# EAGLE board Small_Ethernet (EAGLE 7.3.0)
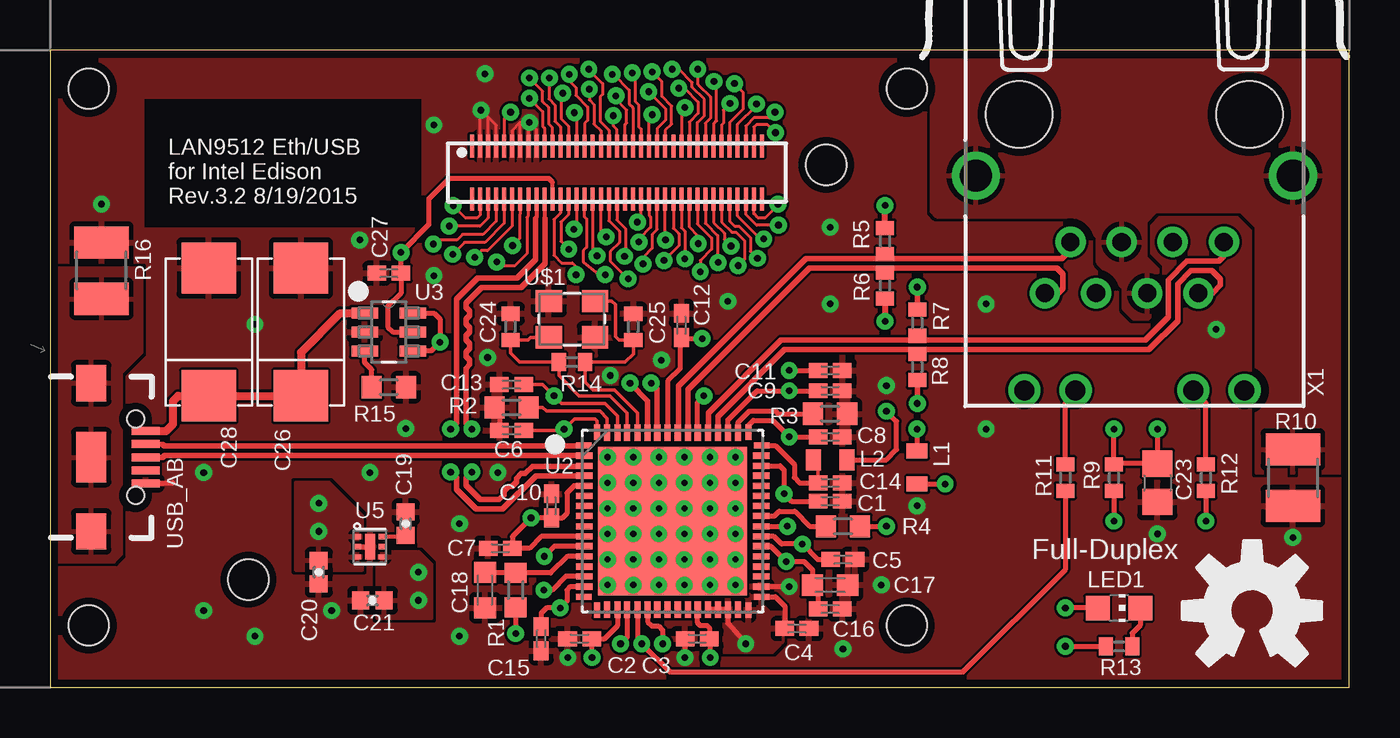
[diagram p0: board, top side]
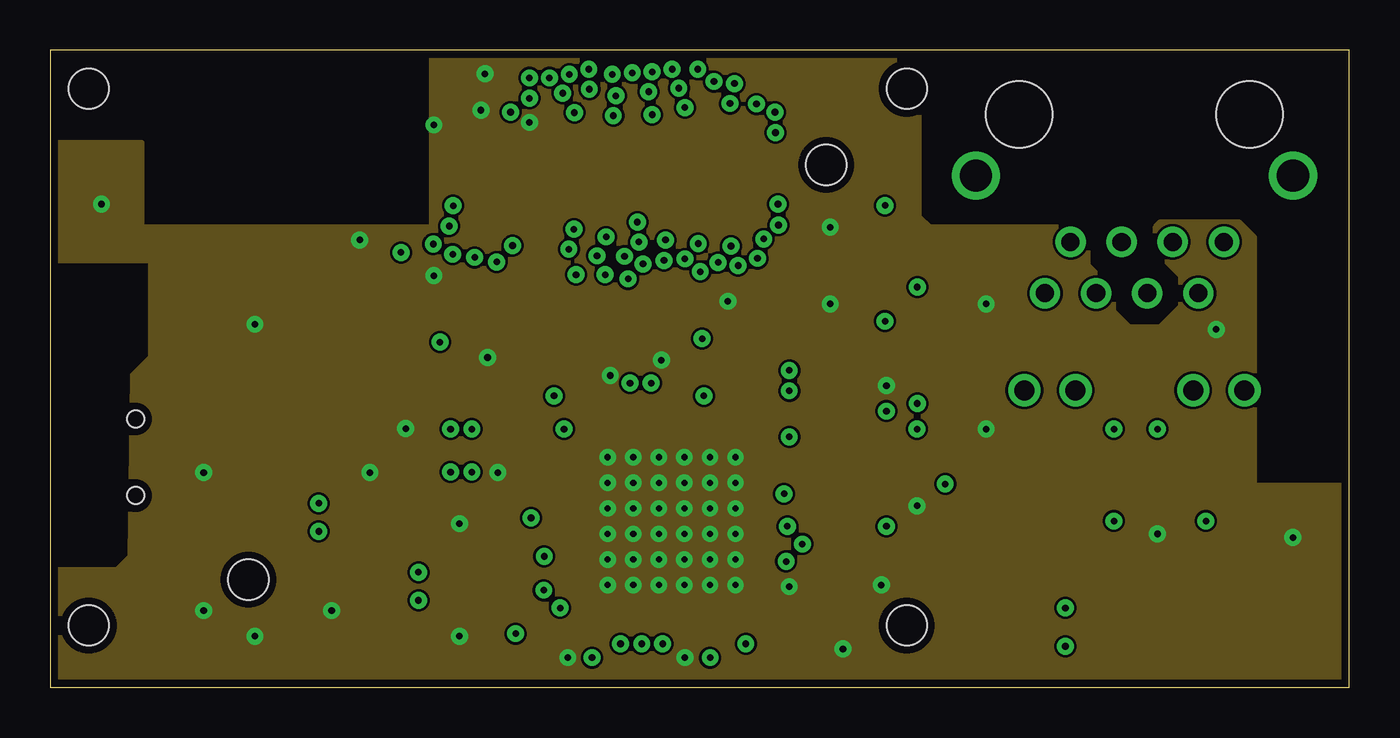
[diagram p1: board, inner layer gnd]
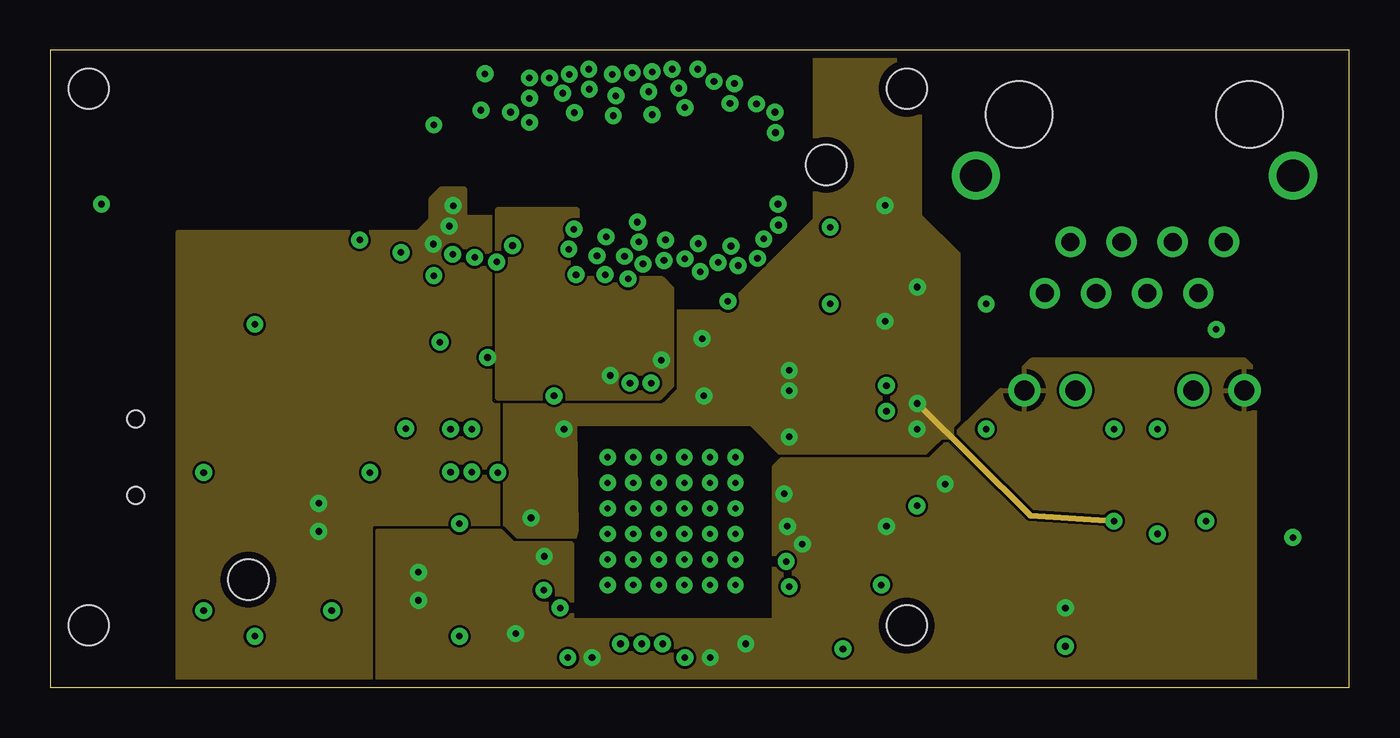
[diagram p2: board, inner layer pwr]
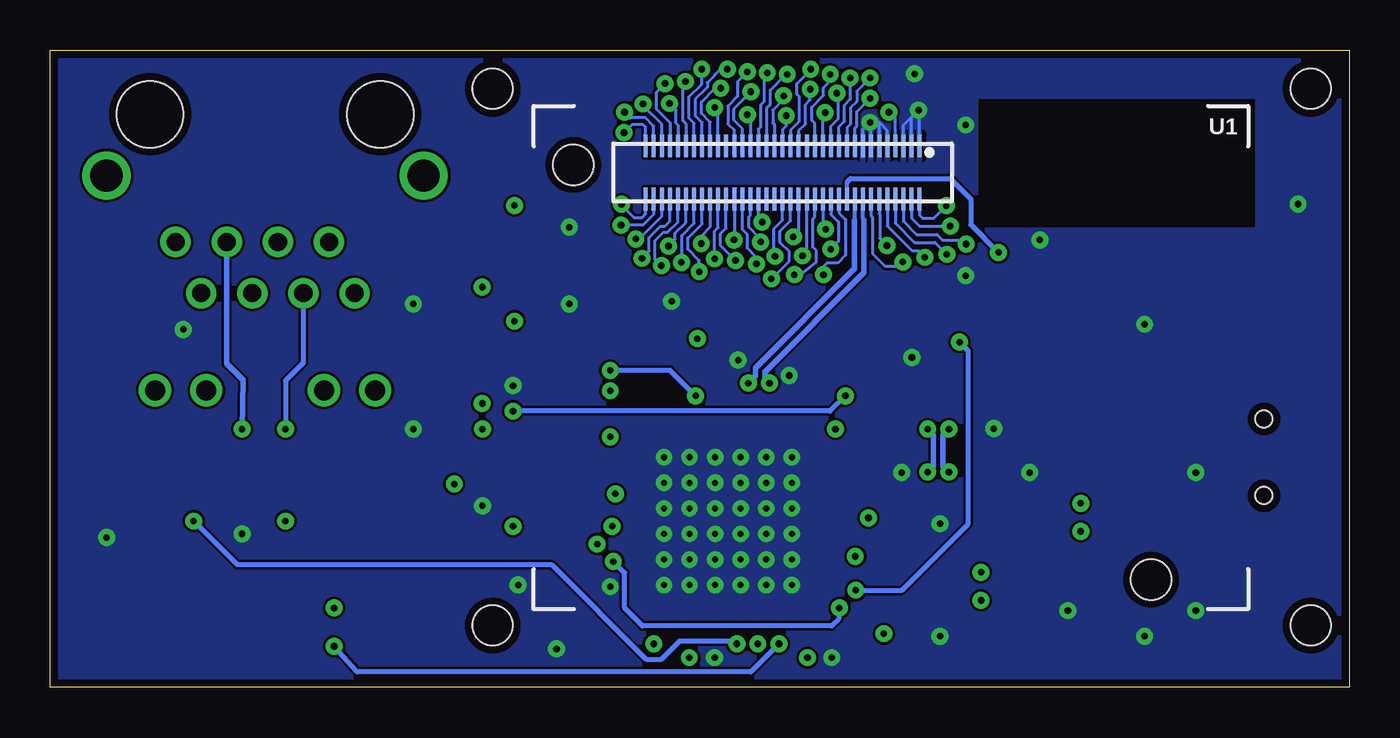
[diagram p3: board, bottom side, seen from below]

Size 64.52 x 31.65 mm. Coordinates in mm from the lower left corner, seen from the top.
Outline: 0,0 64.52,0 64.52,31.65 0,31.65 0,0
Copper layers (1*2*3*16): Top 0.035mm / dielectric 1.5mm / gnd 0.035mm / dielectric 0.15mm / pwr 0.035mm / dielectric 0.2mm / Bottom 0.035mm
Design rules "SparkFun *": minimum track width 5mil, minimum drill 6mil, track to track 5mil, track to pad 5mil, pad to pad 5mil, via to via 5mil, smd to smd 5mil, copper to edge 15mil, drill to drill 8mil, minimum pad ring 12mil, minimum via ring 10mil, stop-mask expansion 4mil, vias tented up to drill 25mil, thermal gap 10mil
Holes 2 mm at 42.55,29.74 42.55,3.07 1.91,3.07 1.91,29.74
tRestrict: area 4.7,22.9 to 18.4,29.2
bRestrict: area 4.7,22.9 to 18.4,29.2

## Footprints (pad centres in the part's own frame; a part is rotated, then mirrored left to right if it is on the bottom)
C0402K = smd 0.925 x 0.74: 1 -0.6,0; 2 0.6,0
C0603K = smd 1.05 x 1.08: 1 -0.875,0; 2 0.875,0
0402-CAP = smd 0.85 x 0.9: 1 -0.58,0; 2 0.58,0
C0805 = smd 1.3 x 1.5: 1 -0.95,0; 2 0.95,0
C0402 = smd 0.7 x 0.9: 1 -0.65,0; 2 0.65,0
CAP-2917 = smd 2.55 x 2.7: NEG -3.175,0; POS 3.175,0
L0603 = smd 0.75 x 1.05: 1 -0.825,0; 2 0.825,0
CHIP-LED0805 = smd 1.2 x 1.2: A 0,-1.05; C 0,1.05
R0603 = smd 1 x 1.1: 1 -0.85,0; 2 0.85,0
R0402 = smd 0.7 x 0.9: 1 -0.65,0; 2 0.65,0
R1210 = smd 1.6 x 2.7: 1 -1.4,0; 2 1.4,0
EDISON_DAUGHTER = smd 1.14 x 0.2: 1 1.98,19.17; 2 4.62,19.17; 3 1.98,18.77; 4 4.62,18.77; 5 1.98,18.37; 6 4.62,18.37; 7 1.98,17.97; 8 4.62,17.97; 9 1.98,17.57; 10 4.62,17.57; 11 1.98,17.17; 12 4.62,17.17; 13 1.98,16.77; 14 4.62,16.77; 15 1.98,16.37; 16 4.62,16.37; 17 1.98,15.97; 18 4.62,15.97; 19 1.98,15.57; 20 4.62,15.57; 21 1.98,15.17; 22 4.62,15.17; 23 1.98,14.77; 24 4.62,14.77; 25 1.98,14.37; 26 4.62,14.37; 27 1.98,13.97; 28 4.62,13.97; 29 1.98,13.57; 30 4.62,13.57; 31 1.98,13.17; 32 4.62,13.17; 33 1.98,12.77; 34 4.62,12.77; 35 1.98,12.37; 36 4.62,12.37; 37 1.98,11.97; 38 4.62,11.97; 39 1.98,11.57; 40 4.62,11.57; 41 1.98,11.17; 42 4.62,11.17; 43 1.98,10.77; 44 4.62,10.77; 45 1.98,10.37; 46 4.62,10.37; 47 1.98,9.97; 48 4.62,9.97; 49 1.98,9.57; 50 4.62,9.57; 51 1.98,9.17; 52 4.62,9.17; 53 1.98,8.77; 54 4.62,8.77; 55 1.98,8.37; 56 4.62,8.37; 57 1.98,7.97; 58 4.62,7.97; 59 1.98,7.57; 60 4.62,7.57; 61 1.98,7.17; 62 4.62,7.17; 63 1.98,6.77; 64 4.62,6.77; 65 1.98,6.37; 66 4.62,6.37; 67 1.98,5.97; 68 4.62,5.97; 69 1.98,5.57; 70 4.62,5.57 | hole 2: 23.53,30.67; 2.93,1.98
QFN50P900X900X100-65N = smd 0.762 x 0.305: 1 -4.42,3.759; 16 -4.42,-3.759; 33 4.42,-3.759; 48 4.42,3.759 | smd 0.813 x 0.305: 2 -4.394,3.251; 3 -4.394,2.743; 4 -4.394,2.261; 5 -4.394,1.753; 6 -4.394,1.245; 7 -4.394,0.762; 8 -4.394,0.254; 9 -4.394,-0.254; 10 -4.394,-0.762; 11 -4.394,-1.245; 12 -4.394,-1.753; 13 -4.394,-2.261; 14 -4.394,-2.743; 15 -4.394,-3.251; 34 4.394,-3.251; 35 4.394,-2.743; 36 4.394,-2.261; 37 4.394,-1.753; 38 4.394,-1.245; 39 4.394,-0.762; 40 4.394,-0.254; 41 4.394,0.254; 42 4.394,0.762; 43 4.394,1.245; 44 4.394,1.753; 45 4.394,2.261; 46 4.394,2.743; 47 4.394,3.251 | smd 0.305 x 0.762: 17 -3.759,-4.42; 32 3.759,-4.42; 49 3.759,4.42; 64 -3.759,4.42 | smd 0.305 x 0.813: 18 -3.251,-4.394; 19 -2.743,-4.394; 20 -2.261,-4.394; 21 -1.753,-4.394; 22 -1.245,-4.394; 23 -0.762,-4.394; 24 -0.254,-4.394; 25 0.254,-4.394; 26 0.762,-4.394; 27 1.245,-4.394; 28 1.753,-4.394; 29 2.261,-4.394; 30 2.743,-4.394; 31 3.251,-4.394; 50 3.251,4.394; 51 2.743,4.394; 52 2.261,4.394; 53 1.753,4.394; 54 1.245,4.394; 55 0.762,4.394; 56 0.254,4.394; 57 -0.254,4.394; 58 -0.762,4.394; 59 -1.245,4.394; 60 -1.753,4.394; 61 -2.261,4.394; 62 -2.743,4.394; 63 -3.251,4.394 | smd 7.391 x 7.391: 65 0,0
21-0058I = smd 1.321 x 0.559: 1 -1.194,0.94; 2 -1.194,0; 3 -1.194,-0.94; 4 1.194,-0.94; 5 1.194,0; 6 1.194,0.94
DF40C-70DP-0.4(51) = smd 0.2 x 1.14 bottom: 1 6.8,1.32; 2 6.8,-1.32; 3 6.4,1.32; 4 6.4,-1.32; 5 6,1.32; 6 6,-1.32; 7 5.6,1.32; 8 5.6,-1.32; 9 5.2,1.32; 10 5.2,-1.32; 11 4.8,1.32; 12 4.8,-1.32; 13 4.4,1.32; 14 4.4,-1.32; 15 4,1.32; 16 4,-1.32; 17 3.6,1.32; 18 3.6,-1.32; 19 3.2,1.32; 20 3.2,-1.32; 21 2.8,1.32; 22 2.8,-1.32; 23 2.4,1.32; 24 2.4,-1.32; 25 2,1.32; 26 2,-1.32; 27 1.6,1.32; 28 1.6,-1.32; 29 1.2,1.32; 30 1.2,-1.32; 31 0.8,1.32; 32 0.8,-1.32; 33 0.4,1.32; 34 0.4,-1.32; 35 0,1.32; 36 0,-1.32; 37 -0.4,1.32; 38 -0.4,-1.32; 39 -0.8,1.32; 40 -0.8,-1.32; 41 -1.2,1.32; 42 -1.2,-1.32; 43 -1.6,1.32; 44 -1.6,-1.32; 45 -2,1.32; 46 -2,-1.32; 47 -2.4,1.32; 48 -2.4,-1.32; 49 -2.8,1.32; 50 -2.8,-1.32; 51 -3.2,1.32; 52 -3.2,-1.32; 53 -3.6,1.32; 54 -3.6,-1.32; 55 -4,1.32; 56 -4,-1.32; 57 -4.4,1.32; 58 -4.4,-1.32; 59 -4.8,1.32; 60 -4.8,-1.32; 61 -5.2,1.32; 62 -5.2,-1.32; 63 -5.6,1.32; 64 -5.6,-1.32; 65 -6,1.32; 66 -6,-1.32; 67 -6.4,1.32; 68 -6.4,-1.32; 69 -6.8,1.32; 70 -6.8,-1.32; NC1 7.2,1.32; NC2 7.2,-1.32; NC3 -7.2,-1.32; NC4 -7.2,1.32
6-UFDFN = smd 1.25 x 0.5: GND 0,0 | smd 0.26 x 0.4: P1 -0.5,-0.625; P2 0,-0.625; P3 0.5,-0.625; P4 0.5,0.625; P5 0,0.625; P6 -0.5,0.625
SMDCRYSTAL_3.2X2.5 = smd 1.3 x 1.1: P1_I/O -1.15,-0.9; P2_GND 1.15,-0.9; P3_O/I 1.15,0.9; P4_GND -1.15,0.9
USB-AB-MICRO-SMD_V03 = smd 1.4 x 0.4: D+1 2.7,0; D-1 2.7,0.65; GND1 2.7,-1.3; ID1 2.7,-0.65; VBUS1 2.7,1.3 | smd 1.5 x 1.8: SHIELD1 0,3.68; SHIELD3 0,-3.68 | smd 1.5 x 2.5: SHIELD2 0,0 | hole 0.85: 2.2,1.9; 2.2,-1.9
J1 = drill 0.9 pad 1.3: 1 4.445,2.54; 2 3.175,0; 3 1.905,2.54; 4 0.635,0; 5 -0.635,2.54; 6 -1.905,0; 7 -3.175,2.54; 8 -4.445,0 | drill 1 pad 1.422: 9 5.465,7.37; 10 2.925,7.37; 11 -2.925,7.37; 12 -5.465,7.37 | drill 1.6 pad 2.184: M1 -7.875,-3.3; M2 7.875,-3.3 | hole 3.3: 5.715,-6.35; -5.715,-6.35

## Placement (x,y rotation side)
C1  0.1  [C0402K]  38.73,9.25 0 top
C2  0.1  [C0402K]  26.29,2.41 180 top
C3  0.1  [C0402K]  32.13,2.41 180 top
C4  0.1  [C0402K]  37.08,2.92 0 top
C5  0.1  [C0402K]  39.37,6.35 0 top
C6  0.1  [C0402K]  22.91,12.76 180 top
C7  0.1  [C0402K]  22.35,6.91 180 top
C8  0.1  [C0402K]  38.73,12.45 0 top
C9  0.1  [C0402K]  38.73,14.73 0 top
C10  0.1  [C0402K]  24.89,9.02 90 top
C11  0.1  [C0402K]  38.73,15.75 0 top
C12  0.1  [C0402K]  31.34,17.98 90 top
C13  1.0  [C0402K]  22.91,15.04 180 top
C14  0.1  [C0402K]  38.73,10.16 0 top
C15  0.1  [C0402K]  24.38,2.41 270 top
C16  0.1  [C0402K]  38.73,3.89 0 top
C17  4.7  [C0603K]  38.73,5.08 0 top
C18  0.01uF  [C0603K]  21.59,4.83 270 top
C19  .1uF  [0402-CAP]  17.65,8.13 90 top
C20  1uF  [0402-CAP]  13.34,5.71 90 top
C21  1uF  [0402-CAP]  16,4.32 180 top
C23  0.022uF  [C0805]  54.99,10.16 270 top
C24  33pF  [C0402]  22.86,17.91 90 top
C25  33pF  [C0402]  28.96,17.91 90 top
C26  [CAP-2917]  12.45,17.65 270 top
C27  1.0  [C0402K]  16.81,20.57 180 top
C28  [CAP-2917]  7.87,17.65 270 top
E$2  [OSHW-LOGO-L]  59.69,3.81 0 top
L1  2.0A 120Ohm  [L0603]  43.05,10.92 90 top
L2  2.0A 120Ohm  [L0603]  38.73,11.3 180 top
LED1  Green LED  [CHIP-LED0805]  53.09,3.94 270 top
R1  10K  [R0603]  23.11,4.83 270 top
R2  12K  [R0603]  22.91,13.9 180 top
R3  12.4K  [R0603]  38.73,13.59 0 top
R4  10K  [R0603]  39.37,8 0 top
R5  49.9  [R0402]  41.46,22.16 90 top
R6  49.9  [R0402]  41.46,19.96 270 top
R7  49.9  [R0402]  43.06,18.12 90 top
R8  49.9  [R0402]  43.06,15.91 270 top
R9  10  [R0402]  52.83,10.41 270 top
R10  0  [R1210]  61.72,10.41 270 top
R11  330  [R0402]  50.42,10.41 270 top
R12  330  [R0402]  57.4,10.41 270 top
R13  330  [R0402]  53.09,2.03 180 top
R14  1M  [R0402]  25.91,16.15 0 top
R15  56k  [R0603]  16.81,14.91 180 top
R16  0  [R1210]  2.54,20.7 90 top
U1  EDISON_CONNECTOR_FULLMOUNTING_HOLES  [EDISON_DAUGHTER]  40.51,28.88 270 bottom
U2  LAN9512-JZX  [QFN50P900X900X100-65N]  30.91,8.26 0 top
U3  MAX4995AAUT+  [21-0058I]  16.81,17.65 0 top
U4  EDISON_CONNECTOR_FULLHEADER  [DF40C-70DP-0.4(51)]  28.14,25.58 0 bottom
U5  [6-UFDFN]  15.88,6.99 270 top
U$1  [SMDCRYSTAL_3.2X2.5]  25.91,18.29 0 top
USB_AB  [USB-AB-MICRO-SMD_V03]  2.03,11.43 0 top
X1  J1011F01P  [J1]  53.85,22.12 180 top

## Library data of the parts
C1-C18 C24 C25 C27 R15 = rcl
C19-C21 = SparkFun-Capacitors
C23 R1-R14 R16 = resistor
C26 C28 U5 U$1 = PoEdev
E$2 = SparkFun-Aesthetics
L1 L2 = murata-inductors
LED1 = led
U1 U4 = Edison
U2 = Lan9512; MPN: LAN9512-JZX; OC_FARNELL: 2292586; OC_NEWARK: 66W1988; PACKAGE: 64VQFN; SUPPLIER: Microchip
U3 = MAX4995; MANUFACTURER_PART_NUMBER: max4995aaut+; VENDOR: MAXIM
USB_AB = SparkFun-Connectors
X1 = con-pulse; OC_FARNELL: unknown; OC_NEWARK: unknown

## Nets
BYP: C19.1 U5.P6
CLKOUT: U2.45
DSUSB_N: U2.1 USB_AB.D-1
DSUSB_P: U2.2 USB_AB.D+1
GND: C1.2 C2.2 C3.2 C4.2 C5.2 C6.2 C7.2 C8.2 C9.2 C10.2 C11.2 C12.2 C13.2 C14.2 C15.2 C16.2 C17.2 C18.2 C19.2 C20.1 C21.2 C23.2 C24.2 C25.2 C26.NEG C27.2 C28.NEG R2.2 R3.2 R10.2 R15.1 R16.2 U1.1 U1.3 U1.5 U1.9 U1.11 U1.13 U1.15 U2.34 U3.2 U4.1 U4.3 U4.5 U4.9 U4.11 U4.13 U4.15 U5.GND U5.P2 U$1.P2_GND U$1.P4_GND USB_AB.GND1
GP28_I2C_6_SDA: U1.47 U4.47
N$1: C13.1 L2.1 U2.62
N$2: C14.1 L2.2 U2.48
N$3: U2.16
N$4: C15.1 C16.1 C17.1 U2.15 U2.38
N$6: R2.1 U2.63
N$7: C18.1 R1.1 U2.12
N$8: R3.1 U2.50
N$9: R4.1 U2.41
N$10: C23.1 R9.1 X1.3 X1.6
N$15: R11.2 U2.21
N$16: R11.1 X1.10
N$17: R12.1 X1.11
N$18: R12.2 U2.22
N$19: LED1.C R13.1
N$20: R13.2 U2.20
N$21: C24.1 R14.1 U2.61 U$1.P1_I/O
N$22: C25.1 R14.2 U2.60 U$1.P3_O/I
N$23: U2.14 U3.4 U3.6
N$26: R15.2 U3.3
P7: U1.7 U4.7
P12: U1.12 U4.12
P14: U1.14 U4.14
P17: U1.17 U4.17
P19: U1.19 U4.19
P21: U1.21 U4.21
P22: U1.22 U4.22
P23: U1.23 U4.23
P24: U1.24 U4.24
P25: U1.25 U4.25
P26: U1.26 U4.26
P27: U1.27 U4.27
P28: U1.28 U4.28
P30: U1.30 U4.30
P31: U1.31 U4.31
P32: U1.32 U4.32
P33: U1.33 U4.33
P34: U1.34 U4.34
P35: U1.35 U4.35
P36: U1.36 U4.36
P37: U1.37 U4.37
P39: U1.39 U4.39
P41: U1.41 U4.41
P42: U1.42 U4.42
P43: U1.43 U4.43
P44: U1.44 U4.44
P45: U1.45 U4.45
P46: U1.46 U4.46
P48: U1.48 U4.48
P50: U1.50 U4.50
P51: U1.51 U4.51
P52: U1.52 U4.52
P53: U1.53 U4.53
P54: U1.54 U4.54
P55: U1.55 U4.55
P56: U1.56 U4.56
P57: U1.57 U4.57
P58: U1.58 U4.58
P59: U1.59 U4.59
P60: U1.60 U4.60
P61: U1.61 U4.61
P62: U1.62 U4.62
P63: U1.63 U4.63
P64: U1.64 U4.64
P65: U1.65 U4.65
P66: U1.66 U4.66
P67: U1.67 U4.67
P68: U1.68 U4.68
P69: U1.69 U4.69
P70: U1.70 U4.70
RX_N: R8.1 U2.52 X1.7
RX_P: R7.1 U2.53 X1.8
S$4: U2.44
S$5: U1.10 U4.10
S$6: U1.8 U4.8
SHLD: R10.1 X1.4 X1.5 X1.M1 X1.M2
TX_N: R5.1 U2.56 X1.2
TX_P: R6.1 U2.55 X1.1
USB_D_N: U2.3 U4.18
USB_D_P: U2.4 U4.16
USB_VBUS: C27.1 U1.20 U3.5 U4.20
USBSHLD: R16.1 USB_AB.SHIELD1 USB_AB.SHIELD2 USB_AB.SHIELD3
USBUP_N: U1.18 U2.58
USBUP_P: U1.16 U2.59
VBUS_OUT: C26.POS C28.POS U3.1 USB_AB.VBUS1
VDD3IO: C1.1 C2.1 C3.1 C4.1 C5.1 C21.1 L1.1 LED1.A R1.2 R4.2 U2.11 U2.19 U2.27 U2.28 U2.29 U2.30 U2.32 U2.33 U2.39 U2.40 U2.46 U5.P4 X1.9 X1.12
VDD33A: C6.1 C7.1 C8.1 C9.1 C10.1 C11.1 C12.1 L1.2 R5.2 R6.2 R7.2 R8.2 R9.2 U2.5 U2.10 U2.49 U2.51 U2.54 U2.57 U2.64
VSYS: C20.2 U1.2 U1.4 U1.6 U4.2 U4.4 U4.6 U5.P1 U5.P3

## Tracks (layer width: path | path; a pad name or v marks a point on that pad's centre or on a via)
BYP
  Top 0.203: U5.P6 17.59,7.49 C19.1
DSUSB_N
  Top 0.27: U2.1 26.42,12 5.65,12 5.59,12.06 USB_AB.D-1
DSUSB_P
  Top 0.27: U2.2 26.42,11.53 5.69,11.53 5.59,11.43 USB_AB.D+1
GND  (via drill 0.3, 0.33)
  Top 0.152: U4.15 24.14,27.72 v23.8,28.07 | U4.13 23.74,27.98 v23.8,28.07 | 23.34,28.07 v23.8,28.07 | U4.11 23.34,28.07 | U4.1 21.34,28.63 v21.39,28.68 21.74,28.32 | U4.3 21.74,28.32 | U4.5 22.14,27.92 21.74,28.32 | 23.34,28.07 22.94,27.67 U4.9
  Top 0.254: U2.34 v36.7,5 | C3.2 31.52,2.61 v31.52,1.47 | USB_AB.GND1 4.76,10.16 6.1,10.16 | U5.P2 U5.GND | R2.2 22.31,13.65 C6.2
  Bottom 0.152: U4.11 23.34,27.84 23.34,28.07 | U4.13 23.74,27.98 v23.8,28.07 | U4.15 24.14,27.72 v23.8,28.07 | U4.9 22.94,27.67 23.34,28.07 | 23.34,28.07 v23.8,28.07 | U4.1 21.34,28.63 v21.39,28.68 21.74,28.32 | U4.3 21.74,28.32 | U4.5 22.14,27.92 21.74,28.32
  other vias: 27.69,5.08 28.96,10.16 27.69,6.35 27.69,7.62 27.69,8.89 27.69,10.16 28.96,5.08 30.23,5.08 32.77,5.08 32.77,8.89 31.5,5.08 61.72,7.44 28.96,6.35 28.96,7.62 30.23,7.62 28.96,8.89 27.69,11.43 30.23,6.35 30.23,8.89 30.23,10.16 31.5,10.16 28.96,11.43 31.5,6.35 31.5,7.62 31.5,8.89 32.77,10.16 30.23,11.43 32.77,7.62 34.04,5.08 32.77,6.35 31.5,11.43 32.77,11.43 34.04,6.35 34.04,7.62 34.04,8.89 34.04,10.16 34.04,11.43 17.65,12.85 2.54,24 19.05,20.45 7.62,10.67 38.73,19.05 33.66,19.18 30.35,16.26 21.72,16.38 41.53,14.99 54.99,7.62 15.37,22.23 10.16,18.03 7.62,3.81 20.32,2.54 20.32,8.13 39.37,1.91 43.05,9.02 41.27,5.08 46.48,19.05 27.81,15.49 22.23,10.67 38.73,22.86 57.91,17.78 46.48,12.83 15.88,10.67 13.97,3.81 10.16,2.54 19.05,27.94 21.59,30.48 25.7,1.47
  pour gnd: 18.92,31.65 18.92,22.86 4.57,22.86 4.57,27.05 0,27.05 0,21.21 4.95,21.21 4.95,16.38 4.06,15.49 3.94,6.48 3.3,5.84 0,5.84 0,0 64.52,0 64.52,10.03 59.82,10.03 59.82,22.35 59.05,23.11 55.12,23.11 54.86,22.86 54.86,21.72 56.13,20.45 56.13,18.92 55.12,17.91 53.59,17.91 52.83,18.67 52.83,19.68 51.56,20.95 51.56,22.1 50.8,22.86 43.69,22.86 43.18,23.37 43.18,31.65
  pour Top (rank 6): 0,0 64.52,0 64.52,31.65 0,31.65
  pour Bottom: 0,0 0,31.65 64.52,31.65 64.52,0
  pour pwr: 22.23,23.75 26.16,23.75 26.16,20.32 30.35,20.32 30.86,19.81 30.86,14.99 30.23,14.35 22.23,14.35
GP28_I2C_6_SDA  (via drill 0.33)
  Top 0.152: v29.9,30.58 30.38,30.1 30.38,29.36 30.86,28.88 30.86,27.99 30.54,27.67 U4.47
  Bottom 0.152: v29.9,30.58 30.38,30.1 30.38,29.36 30.86,28.88 30.86,27.99 30.54,27.67 U4.47
N$1  (via drill 0.33, 0.33 pad 0.33)
  Top 0.178: U2.62 28.17,13.49 27.56,14.1 25.4,14.1 v25.02,14.48 24.46,15.04 C13.1
  Top 0.254: v41.53,13.72 42.04,13.21 42.04,11.81 41.53,11.3 L2.1
  Bottom 0.254: v25.02,14.48 25.78,13.72 v41.53,13.72
N$2
  Top 0.178: 37.99,11.12 38.13,10.98 C14.1
  Top 0.254: U2.48 36.02,12.01 36.96,11.07 36.96,10.41 37.21,10.16 C14.1 | 37.99,11.12 L2.2
N$4  (via drill 0.33)
  Top 0.254: C15.1 24.38,3.68 24.64,3.94 v25.32,3.94 25.65,4.27 25.65,4.83 25.83,5 U2.15 | C16.1 38.13,4.83 37.93,5.03 C17.1 37.86,5.83 37.44,6.25 v36.55,6.25 35.79,7.01 U2.38
  Bottom 0.254: v36.55,6.25 35.99,5.69 35.99,3.94 35.1,3.05 25.7,3.05 25.32,3.43 v25.32,3.94
N$6
  Top 0.178: U2.63 27.66,13.36 27.3,13.72 24.64,13.72 24.45,13.9 R2.1
N$7
  Top 0.254: C18.1 22.84,5.7 R1.1 24.85,5.68 25.68,6.5 U2.12
N$8
  Top 0.254: U2.50 34.16,13.16 34.72,13.72 36.02,13.72 36.14,13.59 R3.1
N$9
  Top 0.254: U2.41 35.97,8.51 36.2,8.74 36.98,8.74 37.72,8 R4.1
N$10  (via drill 0.33)
  Top 0.254: v52.83,12.83 R9.1 52.88,11.11 C23.1 v54.99,12.83
  Bottom 0.254: X1.3 51.94,16.13 52.83,15.24 v52.83,12.83
  Bottom 0.27: X1.6 55.75,16.08 54.94,15.27 v54.99,12.83
N$15  (via drill 0.33)
  Top 0.254: R11.2 50.42,5.84 45.34,0.76 30.77,0.76 v29.38,2.16 29.16,2.38 U2.21
N$16
  Top 0.254: R11.1 50.42,14.12 X1.10
N$17
  Top 0.254: R12.1 57.4,14.12 X1.11
N$18  (via drill 0.33)
  Top 0.254: U2.22 29.67,3.26 29.88,3.05 30.21,3.05 30.42,2.84 v30.42,2.16 | R12.2 v57.4,8.26
  Bottom 0.254: v57.4,8.26 55.24,6.1 39.62,6.1 34.92,1.4 34.16,1.4 33.27,2.29 30.54,2.29 v30.42,2.16
N$19
  Top 0.254: LED1.C 54.14,3.08 53.74,2.68 R13.1
N$20  (via drill 0.33)
  Top 0.254: v50.42,2.03 R13.2 | U2.20 28.65,2.49 v28.32,2.16
  Bottom 0.254: v50.42,2.03 49.28,0.76 29.72,0.76 v28.32,2.16
N$21
  Top 0.178: U2.61 28.65,13.64 27.81,14.48 26.26,14.48 25.26,15.48 R14.1 23.32,16.15 22.86,16.61 C24.1 23.73,17.26 23.86,17.39 U$1.P1_I/O
N$22
  Top 0.178: U2.60 29.16,13.64 28.02,14.78 26.95,14.78 26.56,15.17 R14.2 28.55,16.15 28.96,16.56 C25.1 28.25,17.26 28.07,17.43 28.07,19.01 27.89,19.19 U$1.P3_O/I
N$23  (via drill 0.33)
  Top 0.254: U3.6 19.05,18.59 19.36,18.29 v19.36,17.14 18.92,16.71 U3.4 | U2.14 25.6,5.51 24.92,4.83 v24.51,4.83
  Bottom 0.254: v24.51,4.83 22.23,4.83 18.92,8.13 18.92,16.71 v19.36,17.14
N$26
  Top 0.254: R15.2 15.96,15.79 15.62,16.13 U3.3
P7  (via drill 0.33)
  Top 0.152: v22.86,28.58 22.54,28.26 U4.7
  Bottom 0.152: U4.7 22.54,28.26 v22.86,28.58
P12  (via drill 0.33)
  Top 0.152: U4.12 23.34,23.52 23.32,23.5 23.32,22.3 v22.96,21.95
  Bottom 0.152: U4.12 23.34,23.52 23.32,23.5 23.32,22.3 v22.96,21.95
P14  (via drill 0.33)
  Top 0.152: v22.17,21.13 22.38,20.93 23.06,20.93 23.67,21.54 23.67,23.34 23.74,23.41 U4.14
  Bottom 0.152: v22.17,21.13 22.38,20.93 23.06,20.93 23.67,21.54 23.67,23.34 23.74,23.41 U4.14
P17  (via drill 0.33)
  Top 0.152: v23.8,29.26 24.46,28.6 24.46,27.86 24.54,27.78 U4.17
  Bottom 0.152: U4.17 24.54,27.78 24.46,27.86 24.46,28.6 v23.8,29.26
P19  (via drill 0.33)
  Top 0.152: U4.19 24.94,27.81 24.77,27.99 24.77,28.8 24.46,29.11 24.46,29.62 v23.8,30.28
  Bottom 0.152: v23.8,30.28 24.46,29.62 24.46,29.11 24.77,28.8 24.77,27.99 24.94,27.81 U4.19
P21  (via drill 0.33)
  Top 0.152: v24.79,30.28 24.77,30.25 24.77,29.23 25.07,28.93 25.07,28.12 25.34,27.84 U4.21
  Bottom 0.152: U4.21 25.34,27.84 25.07,28.12 25.07,28.93 24.77,29.23 24.77,30.25 v24.79,30.28
P22  (via drill 0.33)
  Top 0.152: U4.22 25.34,23.57 | 25.34,23.57 | 25.34,23.57 25.01,23.24 25.01,21.47 25.4,21.08 25.93,21.08 26.11,20.9 v26.11,20.5
  Bottom 0.152: U4.22 25.34,23.57 25.01,23.24 25.01,21.47 25.4,21.08 25.93,21.08 26.11,20.9 v26.11,20.5
P23  (via drill 0.33)
  Top 0.152: v25.45,29.52 25.38,29.44 25.38,28.25 25.74,27.88 U4.23
  Bottom 0.152: U4.23 25.74,27.88 25.38,28.25 25.38,29.44 v25.45,29.52
P24  (via drill 0.33)
  Top 0.152: U4.24 25.74,23.5 25.36,23.11 25.36,22.16 v25.76,21.77
  Bottom 0.152: U4.24 25.74,23.5 25.36,23.11 25.36,22.16 v25.76,21.77
P25  (via drill 0.33)
  Top 0.152: v26.04,28.55 26.14,28.44 U4.25
  Bottom 0.152: U4.25 26.14,28.44 v26.04,28.55
P26  (via drill 0.33)
  Top 0.152: U4.26 26.14,22.89 v26.01,22.76
  Bottom 0.152: U4.26 26.14,22.89 v26.01,22.76
P27  (via drill 0.33)
  Top 0.152: v25.78,30.45 25.78,30.12 26.11,29.79 26.11,29.41 26.7,28.83 26.7,28.17 26.54,28.02 U4.27
  Bottom 0.152: U4.27 26.54,28.02 26.7,28.17 26.7,28.83 26.11,29.41 26.11,29.79 25.78,30.12 v25.78,30.45
P28  (via drill 0.33)
  Top 0.152: v27.56,20.5 27.23,20.5 26.47,21.13 26.47,21.69 26.64,21.87 26.64,23.27 26.54,23.37 U4.28
  Bottom 0.152: v27.56,20.5 27.23,20.5 26.47,21.13 26.47,21.69 26.64,21.87 26.64,23.27 26.54,23.37 U4.28
P30  (via drill 0.33)
  Top 0.152: U4.30 26.94,21.65 v27.15,21.44
  Bottom 0.152: v27.15,21.44 26.94,21.65 U4.30
P31  (via drill 0.33)
  Top 0.152: v26.77,29.72 26.77,29.18 27,28.96 27,27.99 27.34,27.65 U4.31
  Bottom 0.152: v26.77,29.72 26.77,29.18 27,28.96 27,27.99 27.34,27.65 U4.31
P32  (via drill 0.33)
  Top 0.152: v27.61,22.38 27.34,22.64 U4.32
  Bottom 0.152: U4.32 27.34,22.64 v27.61,22.38
P33  (via drill 0.33)
  Top 0.152: v26.75,30.71 26.75,30.68 27.43,30 27.43,29.46 27.3,29.34 27.3,28.12 27.74,27.68 U4.33
  Bottom 0.152: v26.75,30.71 26.75,30.68 27.43,30 27.43,29.46 27.3,29.34 27.3,28.12 27.74,27.68 U4.33
P34  (via drill 0.33)
  Top 0.152: U4.34 27.74,23.18 28.27,22.66 28.27,22.1 27.81,21.64 27.81,21.18 v28.7,20.3
  Bottom 0.152: v28.7,20.3 27.81,21.18 27.81,21.64 28.27,22.1 28.27,22.66 27.74,23.18 U4.34
P35  (via drill 0.33)
  Top 0.152: v27.96,28.4 27.96,27.89 28.14,27.71 U4.35
  Bottom 0.152: v27.96,28.4 27.96,27.89 28.14,27.71 U4.35
P36  (via drill 0.33)
  Top 0.152: U4.36 28.14,23.22 28.57,22.78 28.57,21.46 v28.52,21.41
  Bottom 0.152: v28.52,21.41 28.57,21.46 28.57,22.78 28.14,23.22 U4.36
P37  (via drill 0.33)
  Top 0.152: U1.37 28.54,27.96 28.63,28.04 28.63,28.68 28.09,29.21 v28.09,29.39
  Bottom 0.152: v28.09,29.39 28.09,29.21 28.63,28.68 28.63,28.04 28.54,27.96 U1.37
P39  (via drill 0.33)
  Top 0.152: v27.91,30.45 27.96,30.45 28.75,29.67 28.75,28.98 28.94,28.79 U4.39
  Bottom 0.152: v27.91,30.45 27.96,30.45 28.75,29.67 28.75,28.98 28.94,28.79 U4.39
P41  (via drill 0.33)
  Top 0.152: v28.91,30.53 29.06,30.38 29.06,29.11 29.23,28.93 29.23,27.84 29.34,27.73 U1.41
  Bottom 0.152: v28.91,30.53 29.06,30.38 29.06,29.11 29.23,28.93 29.23,27.84 29.34,27.73 U1.41
P42  (via drill 0.33)
  Top 0.152: v29.16,23.11 29.34,23.3 U4.42
  Bottom 0.152: v29.16,23.11 29.34,23.3 U4.42
P43  (via drill 0.33)
  Top 0.152: U1.43 29.74,28.3 v29.9,28.45
  Bottom 0.152: v29.9,28.45 29.74,28.3 U1.43
P44  (via drill 0.33)
  Top 0.152: U4.44 29.74,23.44 29.82,23.37 29.82,22.86 29.23,22.28 v29.23,22.12
  Bottom 0.152: v29.23,22.12 29.23,22.28 29.82,22.86 29.82,23.37 29.74,23.45 U4.44
P45  (via drill 0.33)
  Top 0.152: v29.72,29.59 30.56,28.75 30.56,28.17 30.14,27.76 U4.45
  Bottom 0.152: U4.45 30.14,27.75 30.56,28.17 30.56,28.75 v29.72,29.59
P46  (via drill 0.33)
  Top 0.152: v29.44,21.03 29.44,21.36 29.9,21.82 29.9,22.5 30.14,22.75 U4.46
  Bottom 0.152: v29.44,21.03 29.44,21.36 29.9,21.82 29.9,22.5 30.14,22.75 U4.46
P48  (via drill 0.33)
  Top 0.152: v30.56,22.23 30.54,22.24 U4.48
  Bottom 0.152: U4.48 30.54,22.24 v30.56,22.23
P50  (via drill 0.33)
  Top 0.152: U4.50 30.94,22.8 31.22,22.53 31.22,21.95 v30.48,21.21
  Bottom 0.152: v30.48,21.21 31.22,21.95 31.22,22.53 30.94,22.8 U4.50
P51  (via drill 0.33)
  Top 0.152: v31.52,28.8 31.34,28.62 U4.51
  Bottom 0.152: U4.51 31.34,28.62 v31.52,28.8
P52  (via drill 0.33)
  Top 0.152: U4.52 31.34,22.84 31.52,22.66 v31.52,21.29
  Bottom 0.152: v31.52,21.29 31.52,22.66 31.34,22.84 U4.52
P53  (via drill 0.33)
  Top 0.152: v31.22,29.77 31.5,29.77 32.18,29.08 32.18,28.52 31.74,28.09 U1.53
  Bottom 0.152: U1.53 31.74,28.09 32.18,28.52 32.18,29.08 31.5,29.77 v31.22,29.77
P54  (via drill 0.33)
  Top 0.152: v32.18,22.05 32.18,22.43 31.74,22.87 U4.54
  Bottom 0.152: U4.54 31.74,22.87 32.18,22.43 v32.18,22.05
P55  (via drill 0.33)
  Top 0.152: U4.55 32.14,28.05 32.49,28.4 32.49,29.21 31.88,29.82 31.88,30.05 31.22,30.71 v30.89,30.71
  Bottom 0.152: v30.89,30.71 31.22,30.71 31.88,30.05 31.88,29.82 32.49,29.21 32.49,28.4 32.14,28.05 U4.55
P56  (via drill 0.33)
  Top 0.152: U4.56 32.14,23.03 32.84,22.33 32.84,21.77 32.28,21.21 v32.28,20.65
  Bottom 0.152: v32.28,20.65 32.28,21.21 32.84,21.77 32.84,22.33 32.14,23.03 U4.56
P57  (via drill 0.33)
  Top 0.152: U4.57 32.54,28.02 32.79,28.27 32.79,29.34 32.18,29.95 32.18,30.68 v32.16,30.71
  Bottom 0.152: v32.16,30.71 32.18,30.68 32.18,29.95 32.79,29.34 32.79,28.27 32.54,28.02 U4.57
P58  (via drill 0.33)
  Top 0.152: U4.58 32.54,23.06 33.15,22.45 33.15,21.13 v33.17,21.11
  Bottom 0.152: v33.17,21.11 33.15,21.13 33.15,22.45 32.54,23.06 U4.58
P59  (via drill 0.33)
  Top 0.152: v32.97,30.1 33.1,29.97 33.1,28.14 32.94,27.99 U4.59
  Bottom 0.152: U4.59 32.94,27.99 33.1,28.14 33.1,29.97 v32.97,30.1
P60  (via drill 0.33)
  Top 0.152: U4.60 32.94,23.09 33.48,22.55 33.48,22.25 v33.81,21.92
  Bottom 0.152: v33.81,21.92 33.48,22.25 33.48,22.55 32.94,23.09 U4.60
P61  (via drill 0.33)
  Top 0.152: v33.76,29.01 33.43,28.68 33.43,28.02 33.34,27.93 U4.61
  Bottom 0.152: v33.76,29.01 33.43,28.68 33.43,28.02 33.34,27.93 U4.61
P62  (via drill 0.33)
  Top 0.152: U4.62 33.34,23.12 33.86,22.61 34.06,22.61 34.47,22.2 34.47,21.26 v34.16,20.95
  Bottom 0.152: v34.16,20.95 34.47,21.26 34.47,22.2 34.06,22.61 33.86,22.61 33.34,23.12 U4.62
P63  (via drill 0.33)
  Top 0.152: v33.98,30 34.42,29.57 34.42,28.73 33.74,28.05 U4.63
  Bottom 0.152: v33.98,30 34.42,29.57 34.42,28.73 33.74,28.05 U4.63
P64  (via drill 0.33)
  Top 0.152: U4.64 33.74,23.15 33.98,22.91 34.21,22.91 34.77,22.35 34.77,21.67 v35.13,21.31
  Bottom 0.152: v35.13,21.31 34.77,21.67 34.77,22.35 34.21,22.91 33.98,22.91 33.74,23.15 U4.64
P65  (via drill 0.33)
  Top 0.152: U4.65 34.14,27.97 35.08,28.91 v35.08,28.98
  Bottom 0.152: v35.08,28.98 35.08,28.91 34.14,27.97 U4.65
P66  (via drill 0.33)
  Top 0.152: v35.43,22.28 35.28,22.28 34.14,23.41 U4.66
  Bottom 0.152: v35.43,22.28 35.28,22.28 34.14,23.41 U4.66
P67  (via drill 0.33)
  Top 0.152: v35.99,28.57 35.71,28.3 34.95,28.3 34.54,27.89 U4.67
  Bottom 0.152: U4.67 34.54,27.89 34.95,28.3 35.71,28.3 v35.99,28.57
P68  (via drill 0.33)
  Top 0.152: v36.17,22.96 35.08,22.96 34.54,23.5 U4.68
  Bottom 0.152: v36.17,22.96 35.08,22.96 34.54,23.5 U4.68
P69  (via drill 0.33)
  Top 0.152: v36.02,27.56 35.61,27.96 35.08,27.96 34.94,27.83 U4.69
  Bottom 0.152: U4.69 34.94,27.83 35.08,27.96 35.61,27.96 v36.02,27.56
P70  (via drill 0.33)
  Top 0.152: v36.14,24 36.14,23.95 35.53,23.34 35.13,23.34 34.94,23.53 U4.70
  Bottom 0.152: v36.14,24 36.14,23.95 35.53,23.34 35.13,23.34 34.94,23.53 U4.70
RX_N
  Top 0.27: U2.52 33.15,12.65 33.15,13.46 36.47,16.78 43.12,16.78 | 43.12,16.78 54.58,16.78 55.99,18.2 55.99,20.05 56.65,20.71 57.7,20.71 58.12,20.28 58.12,19.98 57.73,19.58 X1.7 | R8.1 43.12,16.78
RX_P
  Top 0.27: U2.53 32.68,12.85 32.68,13.64 36.29,17.25 43.12,17.25 | 43.12,17.25 54.38,17.25 55.52,18.39 55.52,20.24 56.46,21.18 58.05,21.18 58.29,21.42 X1.8 | R7.1 43.12,17.25
S$5  (via drill 0.33)
  Top 0.152: v21.08,21.36 21.39,21.69 21.72,21.69 22.94,22.92 U4.10
  Bottom 0.152: U4.10 22.94,22.92 21.72,21.69 21.39,21.69 v21.08,21.36
S$6  (via drill 0.33)
  Top 0.152: U1.8 22.54,23.05 21.59,22.1 20.57,22.1 v19.99,21.51
  Bottom 0.152: U1.8 22.54,23.05 21.59,22.1 20.57,22.1 v19.99,21.51
SHLD
  pour Top (isolate 0.406, rank 2): 64.52,31.65 64.52,10.67 59.94,10.67 59.94,22.89 59.18,23.65 54.86,23.65 54.36,23.14 54.36,21.36 55.63,20.09 55.63,19.08 54.86,18.31 53.85,18.31 53.34,18.82 53.34,19.84 52.07,21.11 52.07,22.38 51.05,23.39 44.07,23.39 43.81,23.65 43.81,31.65
TX_N
  Top 0.27: U2.56 31.19,12.85 31.19,14.97 37.52,21.3 41.72,21.3 | 41.72,21.3 50.24,21.3 50.67,21.73 X1.2 | R5.1 41.72,21.3
TX_P
  Top 0.27: U2.55 31.66,12.91 31.66,14.79 37.7,20.83 41.52,20.83 | 41.52,20.83 49.99,20.83 50.29,20.53 50.29,19.81 50.06,19.58 X1.1 | R6.1 41.52,20.83
USB_D_N  (via drill 0.33)
  Top 0.203: U4.18 24.54,23.32 24.58,23.28
  Top 0.27: U2.3 26.42,10.98 23.94,10.98 23.57,10.62 23.39,10.62 23.16,10.39 23.16,10.21 22.94,9.98 22.76,9.98 22.53,9.75 22.53,9.57 22.3,9.34 21.35,9.34 20.64,10.04 20.64,10.4 v20.93,10.69 | v20.93,12.83 20.64,13.12 20.65,15.85 20.83,16.03 20.83,16.26 20.65,16.43 20.65,16.66 20.83,16.84 20.83,17.07 20.65,17.25 20.65,17.48 20.83,17.65 20.83,17.88 20.65,18.06 20.65,18.29 20.83,18.47 20.83,18.69 20.64,18.88 20.64,19.09 21.41,19.86 23.39,19.86 24.58,21.05 24.58,23.28
  Bottom 0.27: v20.93,12.83 20.64,12.54 20.64,10.98 v20.93,10.69
USB_D_P  (via drill 0.33)
  Top 0.203: U4.16 24.14,23.32 24.11,23.29
  Top 0.27: U2.4 26.42,10.51 24.12,10.51 22.47,8.86 21.14,8.86 20.18,9.83 20.18,10.4 v19.89,10.69 | v19.89,12.83 20.18,13.12 20.18,19.28 21.23,20.33 23.19,20.33 24.11,21.25 24.11,23.29
  Bottom 0.27: v19.89,12.83 20.18,12.54 20.18,10.98 v19.89,10.69
USB_VBUS  (via drill 0.33 pad 0.33)
  Top 0.203: U4.20 24.94,25.09
  Top 0.254: U3.5 17.02,17.65 16.76,17.91 16.76,18.92 17.41,19.57 C27.1 v17.41,21.6 18.8,22.98 18.8,24.26 19.81,25.27 24.77,25.27 24.94,25.09
  Bottom 0.152: 24.94,25.02
  Bottom 0.203: U4.20 24.94,25.02 24.94,25.09
  Bottom 0.254: 24.94,25.09 24.77,25.27 19.81,25.27 18.8,24.26 18.8,22.98 v17.41,21.6
USBSHLD
  pour Top: 0.25,20.83 0.25,6.22 3.17,6.22 3.56,6.6 3.56,15.62 4.57,16.64 4.57,20.83
USBUP_N  (via drill 0.33)
  Top 0.27: U2.58 30.14,12.95 30.14,14.81 v29.84,15.11
  Bottom 0.203: 24.57,23.22 24.54,23.25 U1.18
  Bottom 0.27: 24.57,23.22 24.57,20.79 29.49,15.87 29.49,15.46 v29.84,15.11
USBUP_P  (via drill 0.33)
  Top 0.27: U2.59 29.67,12.9 29.67,14.23 v28.79,15.11
  Bottom 0.203: 24.1,23.22 24.14,23.25 U1.16
  Bottom 0.27: 24.1,23.22 24.1,20.59 29.02,15.67 29.02,15.34 v28.79,15.11
VBUS_OUT
  Top 0.406: USB_AB.VBUS1 5.75,12.73 6.1,13.08 6.1,14.22 6.35,14.48 C28.POS C26.POS 12.45,16.64 14.4,18.59 U3.1
VDD3IO  (via drill 0.33)
  Top 0.254: U2.46 36.25,11 36.45,10.79 v36.45,9.61 36.82,9.25 C1.1 | LED1.A v50.42,3.94 | R4.2 v41.53,8 | U2.11 25.04,7.01 v24.54,6.5 | v26.91,1.47 26.91,2.47 C2.1 27.54,2.41 28.17,3.04 U2.19 | U2.30 33.66,3.17 v34.54,2.16 | U2.27 32.16,3.19 32.29,3.06 32.63,3.06 32.73,2.96 C3.1 32.78,2.44 v32.78,1.47 | R1.2 v23.11,2.67 | L1.1 v44.45,10.1 | U2.40 v36.61,8 | U2.39 35.94,7.49 36.32,7.11 v37.35,7.11 38.11,6.35 C5.1 | U2.33 36.02,4.5 36.48,4.03 C4.1
  Top 0.305: U2.28 U2.29 U2.30
  other vias: 18.29,5.71 18.29,4.32
  pour Top: 33.53,1.78 33.53,4.57 34.8,4.57 35.69,3.68 36.32,3.68 36.32,2.29 35.81,1.78
  pour pwr: 16.26,0 59.82,0 59.82,15.75 59.31,16.26 48.77,16.26 43.69,11.3 36.32,11.3 35.94,10.92 35.94,3.3 25.91,3.3 25.91,7.11 22.99,7.11 22.35,7.75 16.26,7.75
  pour Top: 16.26,3.43 16.26,6.73 18.29,6.73 18.92,6.1 18.92,3.43
VDD33A  (via drill 0.33)
  Top 0.178: U2.64 27.15,13.23 27.05,13.34 26.03,13.34 v25.52,12.83 25.46,12.76 C6.1
  Top 0.254: R9.2 v52.83,8.26 | U2.57 30.66,15.21 31.29,15.85 31.29,17.33 | v36.7,15.75 C11.1 | C8.1 v36.7,12.45 35.88,13.27 34.92,13.27 34.67,13.01 U2.49 | 31.29,17.33 C12.1 | 31.29,17.33 31.35,17.33 v32.38,17.32 | v43.05,12.83 L1.2 | U2.51 33.66,13.28 35.1,14.73 v36.7,14.73 C9.1 | U2.54 32.16,14.17 v32.46,14.48 | U2.10 24.38,7.49 23.8,6.91 C7.1 22.95,7.49 v23.88,8.42 C10.1 25.43,8.42 25.65,8.64 25.65,9.65 26.01,10.01 U2.5
  Top 0.27: R7.2 v43.06,19.89 | R8.2 v43.06,14.1
  Top 0.3: R5.2 v41.46,23.94 | R6.2 v41.46,18.19
  pwr 0.305: v43.06,14.1 48.67,8.53 v52.83,8.26
  Bottom 0.254: v32.46,14.48 33.73,15.75 v36.7,15.75
  pour pwr (rank 3): 26.11,7.8 25.91,7.09 23.04,7.09 22.23,7.9 22.23,14.35 30.33,14.35 30.86,15.03 30.86,18.67 33.43,18.67 38,23.24 38,31.65 43.18,31.65 43.18,23.42 45.09,21.51 45.09,12.7 43.69,11.3 36.63,11.3 34.85,13.08 26.04,13.08
VSYS  (via drill 0.33)
  Top 0.152: U4.2 21.34,23.45 21.21,23.32 20.62,23.32 v20.02,23.93 | U4.4 21.74,23.32 21.34,22.91 v19.81,22.91 | U4.6 22.14,23.16 21.49,22.5 20.47,22.5 20.19,22.23 19.23,22.23 v19.02,22.02
  Bottom 0.152: U4.2 21.34,23.45 21.21,23.32 20.62,23.32 v20.02,23.93 | U4.4 21.74,23.32 21.34,22.91 v19.81,22.91 | U4.6 22.14,23.16 21.49,22.5 20.47,22.5 20.19,22.23 19.23,22.23 v19.02,22.02
  Bottom 0.178: v19.81,22.91 19.86,22.91
  other vias: 13.34,7.75 13.34,9.14
  pour Top: 12.19,5.84 15.49,5.84 15.49,8.51 13.84,10.16 12.19,10.16
  pour pwr (rank 2): 16.26,0 6.35,0 6.35,22.61 18.29,22.61 18.92,23.24 18.92,24.26 19.43,24.77 20.57,24.77 20.57,23.37 22.23,23.37 22.23,7.75 16.26,7.75

## Text on the board
tPlace: LAN9512 Eth/USB / for Intel Edison / Rev.3.2 8/19/2015 | Full-Duplex
tDocu: Designed By: Chleo Bales-Heisterkamp and Asa Graf